# Altium PCB Arduino-RedBoard_rev1.0.PcbDoc
Units mm, origin at the board's own origin, x right, y up, seen from the top; angles counter-clockwise.
Board outline 68.6 x 53.3 mm, 2 copper layers (Top Layer, Bottom Layer); 50 components, 48 nets, 196 pads, 67 vias.
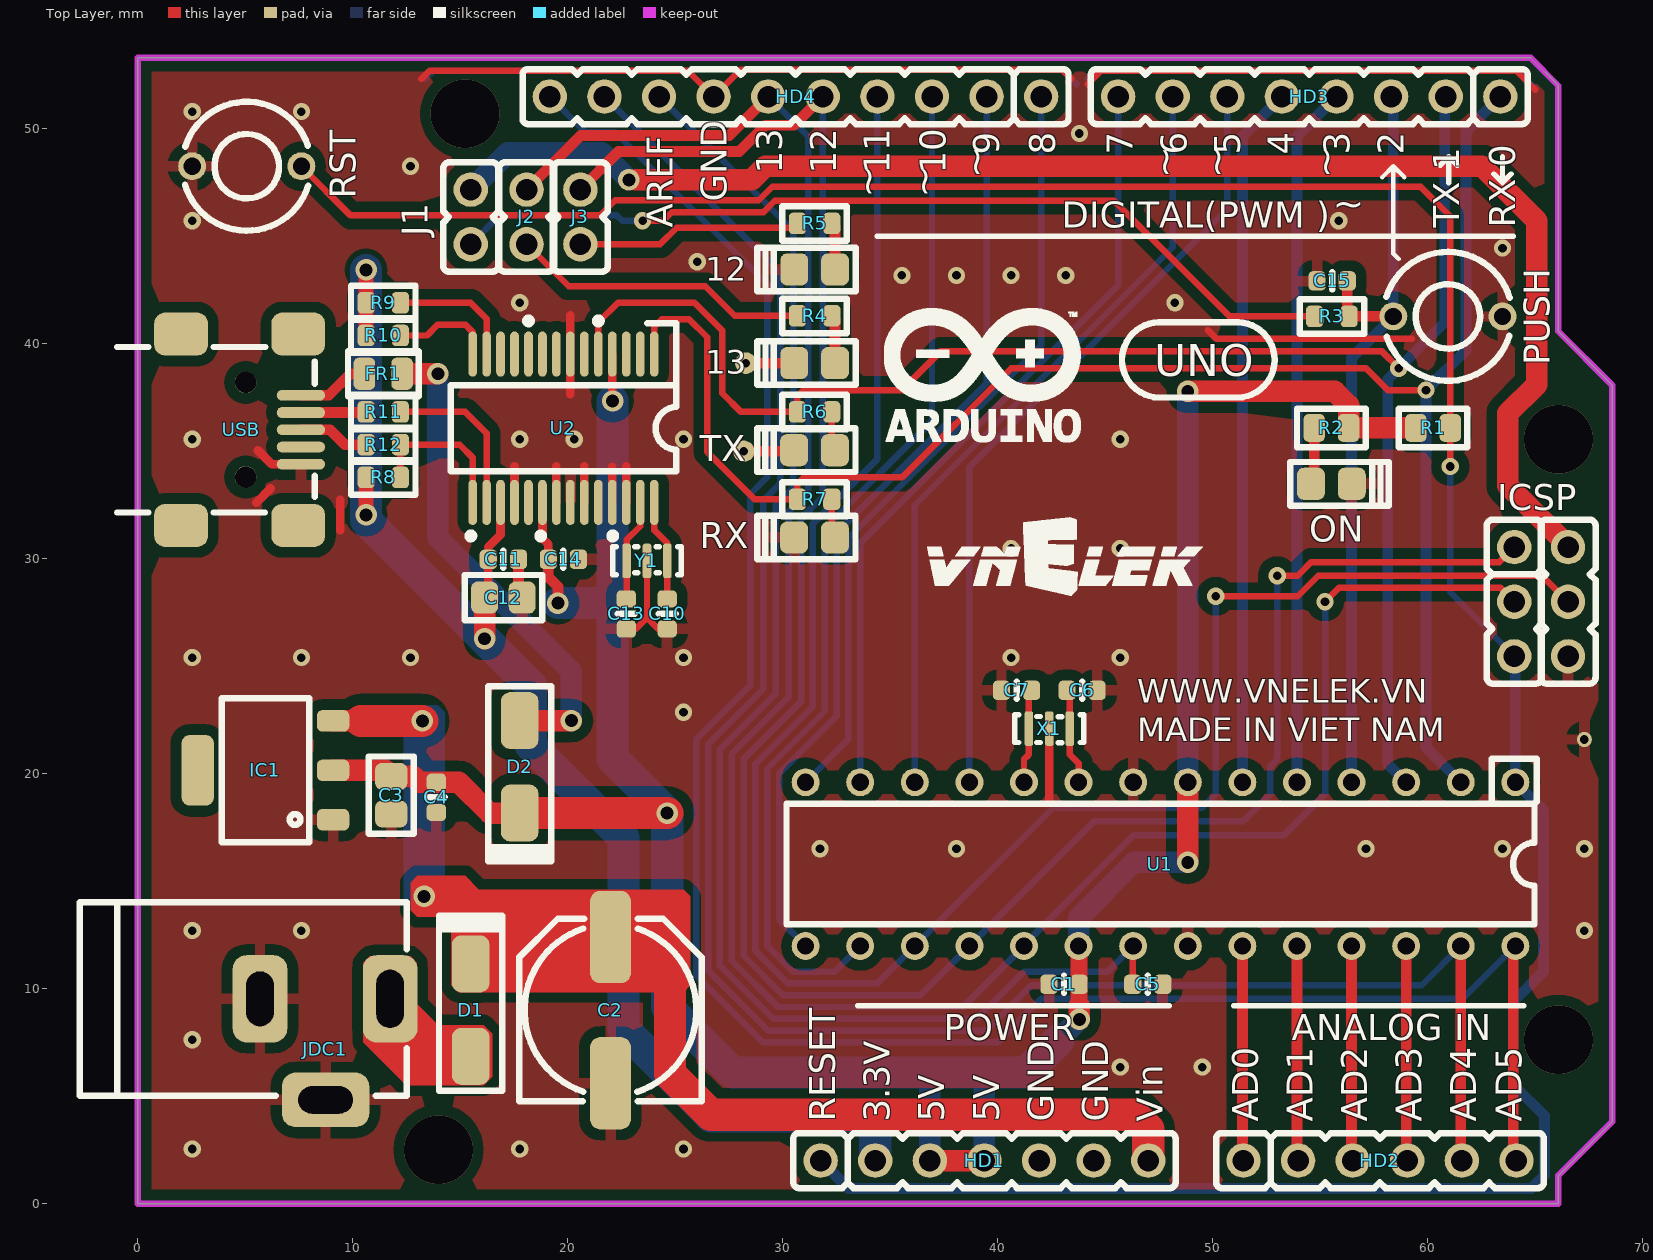
[diagram p0: Top Layer view]
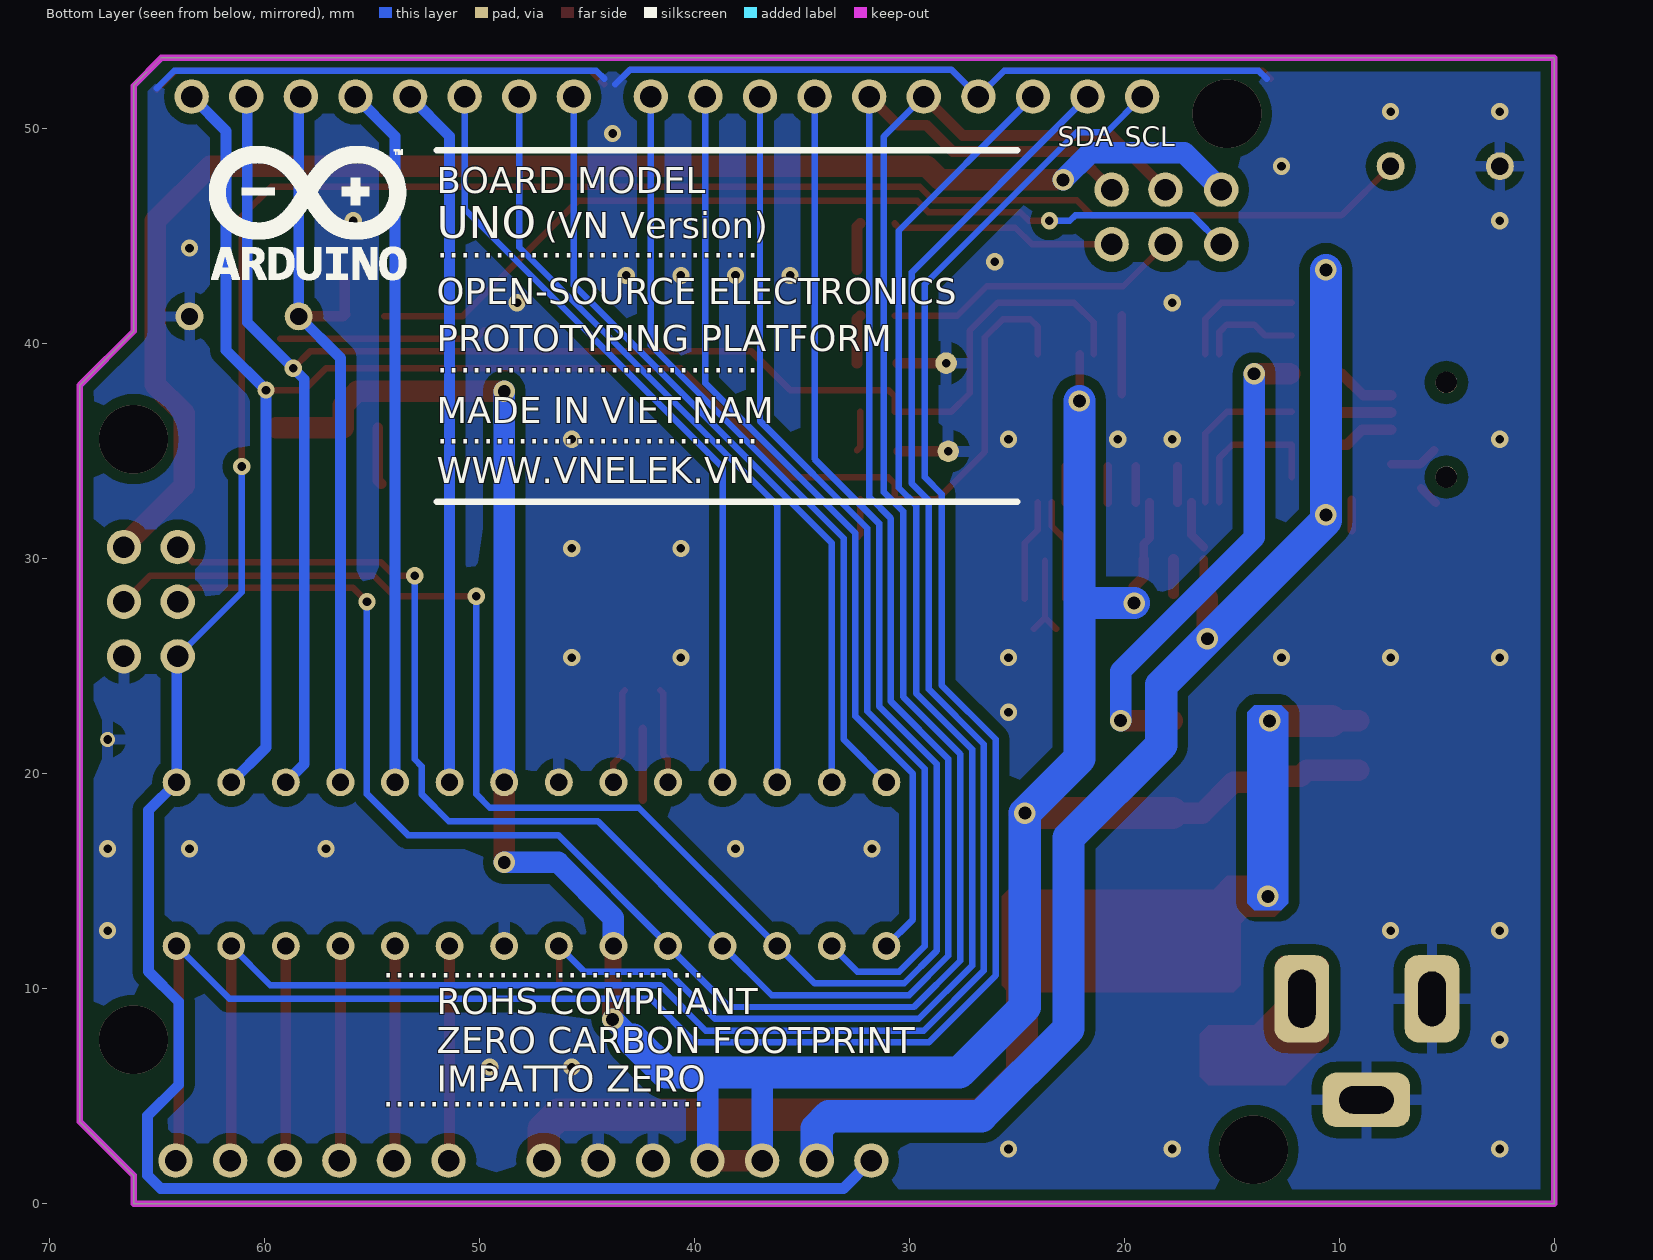
[diagram p1: Bottom Layer view, seen from below]
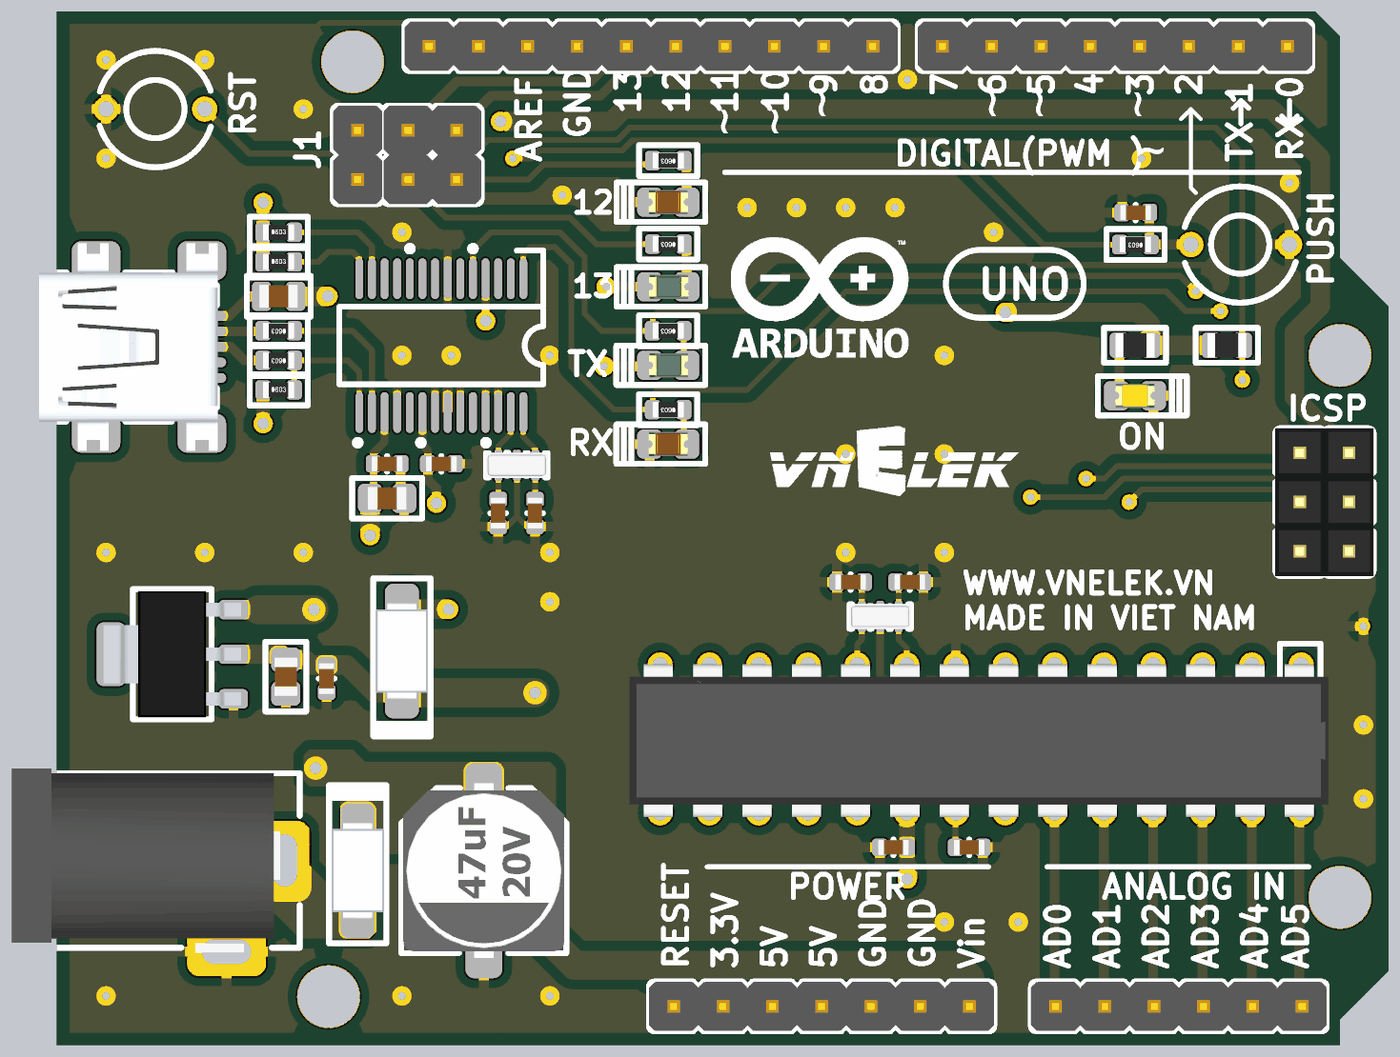
[diagram p2: 3D render of the assembled board from above, using the file's embedded part models]

## Layer stack, top to bottom
Top Layer: signal copper 0.0356
Dielectric: dielectric 0.32, FR-4, Dk 4.8
Bottom Layer: signal copper 0.0356

## Board outline
0,0 66.1,0 66.1,1.31 68.6,3.81 68.6,38.08 66.1,40.58 66.1,52.01 64.81,53.3 0,53.3 0,0

## Design rules (kind name [scope] priority, off if disabled: settings)
Clearance [All] p1: gap=0.25
PlaneClearance [All] p1: clearance=0.5
PlaneConnect [All] p1: planeconnectstyle=Relief reliefexpansion=0.508 reliefentries=4 reliefconductorwidth=0.5 reliefairgap=0.254
PolygonConnect PolygonConnect_1 [isvia] p1: connectstyle=Direct reliefconductorwidth=0.254 reliefentries=4 polygonreliefangle="90 Angle"
PolygonConnect [All] p2: connectstyle=Relief reliefconductorwidth=0.5 reliefentries=4 polygonreliefangle="90 Angle"
RoutingVias [All] p1: holewidth=0.8 width=1.2 viastyle="Through Hole" minholewidth=0.4 minwidth=0.8 maxholewidth=0.6 maxwidth=1
SilkscreenOverComponentPads [All] p1: minsilkscreentomaskgap=0.254
SolderMaskExpansion [All] p1: expansion=0.102
Width [All] p1: maxlimit=2 minlimit=0.3 preferedwidth=1
25 further rules are at their usual default settings.

## Classes and differential pairs
component class Arduino-RedBoard_new: 12 C1 C2 C3 C4 C5 C6 C7 C10 C11 C12 C13 C14 D1 D2 FR1 HD1 HD2 HD3 HD4 IC1 ICSP J1 J2 J3 JDC1 ON PUSH R1 R2 R3 R4 R5 R8 R9 R10 R11 R12 RST RX TX U1 U2 USB X1 Y1

## Components (designator, comment, footprint, x,y, rotation, side; value= is the part's Value field where it differs from the comment)
12 "Red" "Led 0805R" 31.5,43.46 r180 top (schematic designator LED3)
13 "Green" "Led 0805G" 31.5,39.1 r180 top (schematic designator LED2)
C1 "5AK102KABAA" C0603 43.1,10.2 r0 top
C2 "47uF/25V" C_FK_47UF_25V 22,9 r270 top
C3 "10uF/16V" C0805 11.8,19 r270 top
C4 "100nF" C0603 13.9,18.9 r90 top
C5 "5AK102KABAA" C0603 47,10.2 r180 top
C6 "5AK102KABAA" C0603 43.942,23.876 r180 top
C7 "5AK102KABAA" C0603 40.894,23.876 r0 top
C10 "CC0603JRNPO9BN" C0603 24.638,27.432 r90 top
C11 "CC0603JRNPO9BN" C0603 17.018,29.972 r180 top
C12 "C0805KRX7R7BB" C0805 17.018,28.194 r0 top
C13 "CC0603JRNPO9BN" C0603 22.738,27.432 r90 top
C14 "CC0603JRNPO9BN" C0603 19.812,29.972 r0 top
C15 "100nF" C0603 55.576,42.926 r0 top
D1 "SS14" SS14 15.5,9 r90 top
D2 "SS14" SS14 17.78,20.32 r270 top
FR1 "Ferrit Bead" CB2012 11.43,38.608 r0 top
HD1 "POWER" Header_7 39.4,2 r0 top
HD2 "AD" Header_6 57.8,2 r0 top
HD3 "IOL" Header_8 54.51,51.5 r180 top
HD4 "IOH" Header_10 30.61,51.5 r180 top
IC1 "AMS1117 (5V)" AMS1117-5.0V 5.95,20.155 r90 top
ICSP "ISP" Header_3x2 65.3,28 r270 top (schematic designator HD5)
J1 "Short Jump" Header_2 15.5,45.9 r90 top
J2 "Short Jump" Header_2 18.1,45.9 r90 top
J3 "Short Jump" Header_2 20.6,45.9 r90 top
JDC1 "Jack DC" DC-IN 11.747,9.525 r0 top
ON "Green" "Led 0805Y" 55.54,33.484 r0 top (schematic designator LED1)
PUSH "RESET" "BUTTON 2PIN TRON" 63.5,41.275 r180 top (schematic designator SW2)
R1 "Res2" RESC2012L 60.27,36.084 r180 top
R2 "Res2" RESC2012L 55.54,36.084 r0 top
R3 "Res2" "RM06JTN (0603)" 55.562,41.275 r180 top
R4 "Res2" "RM06JTN (0603)" 31.5,41.3 r180 top
R5 "Res2" "RM06JTN (0603)" 31.5,45.6 r180 top
R6 "Res2" "RM06JTN (0603)" 31.496,36.83 r180 top
R7 "Res2" "RM06JTN (0603)" 31.496,32.766 r180 top
R8 "RM06JTN" "RM06JTN (0603)" 11.43,33.782 r0 top
R9 "RM06JTN" "RM06JTN (0603)" 11.43,41.91 r0 top
R10 "RM06JTN" "RM06JTN (0603)" 11.43,40.386 r0 top
R11 "Res2" "RM06JTN (0603)" 11.43,36.83 r180 top
R12 "Res2" "RM06JTN (0603)" 11.43,35.306 r180 top
RST "RESET" "BUTTON 2PIN TRON" 2.54,48.26 r0 top (schematic designator SW1)
RX "Yellow" "Led 0805R" 31.496,30.988 r180 top (schematic designator LED5)
TX "Yellow" "Led 0805G" 31.496,35.052 r180 top (schematic designator LED4)
U1 "ATmega328 (DIP)" "ATmega328 (DIP)" 64.1,19.6 r180 top
U2 "PL2303_TA" PL2303HX 19.812,36.068 r270 top
USB "USB Mini" USBMNIB 7.6,36 r270 top (schematic designator USB1)
X1 "12Mhz" CSTCE16M0V53-R0 42.418,22.098 r180 top
Y1 "12MHz" CSTCE16M0V53-R0 23.7,29.9 r0 top

## Footprints (in the part's own frame and the unit in brackets; to place one, negate y for a bottom-side part, rotate by r counter-clockwise, add the part's x,y. Pads: shape width x height; smd on the part's side, far side on the other; paste and mask are expansions set on the pad)
AMS1117-5.0V [mm] "SOT223, 4-Leads, Body 6.7x7.3mm (max), Pitch 2.30mm, IPC Medium Density"
  rrect50% 1x1.5 smd: 1(-2.3,-3.15) 2(0,-3.15) 3(2.3,-3.15)
  rrect50% 3.28x1.5 smd: 4(0,3.15)
  silkscreen extent -3.35,-2.03 3.35,2.03, body extent -3.25,-3.54 3.25,3.54, height 1.65
"ATmega328 (DIP)" [mm] "DIP 28, W7.62, Picth 2.54"
  round 1.3 hole 0.8: 1(0,0) 2(2.54,0) 3(5.08,0) 4(7.62,0) 5(10.16,0) 6(12.7,0) 7(15.24,0) 8(17.78,0) 9(20.32,0) 10(22.86,0) 11(25.4,0) 12(27.94,0) 13(30.48,0) 14(33.02,0) 15(33.02,7.62) 16(30.48,7.62) 17(27.94,7.62) 18(25.4,7.62) 19(22.86,7.62) 20(20.32,7.62) 21(17.78,7.62) 22(15.24,7.62) 23(12.7,7.62) 24(10.16,7.62) 25(7.62,7.62) 26(5.08,7.62) 27(2.54,7.62) 28(0,7.62)
  silkscreen extent -1,-1.1 33.91,6.6, body extent -1.4,-0.03 34.6,7.84, height 5.08
"BUTTON 2PIN TRON" [mm] "PIN TO PIN 5.08, W=6MM"
  round 1.3 hole 0.8: 1(0,0) 2(5.08,0)
  silkscreen extent -0.33,-3 5.4,3
C0603 [mm] "Chip Capacitor, Body 1.6x0.8mm, 1608"
  rrect50% 0.8x0.9 smd: 1(-0.7,0) 2(0.7,0)
  silkscreen extent 0,-0.4 0,0.4, body extent -0.8,-0.4 0.8,0.4, height 0.6
C0805 [mm] "Chip Capacitor, 2-Leads, Body 2.0x1.3mm, IPC Medium Density"
  rrect50% 1.25x1.5 smd: 1(-0.875,0) 2(0.875,0)
  silkscreen extent -1.8,-1.05 1.8,1.05, body extent -1,-0.6 1,0.6, height 0.95
C_FK_47UF_25V [mm] "ALUMINUM CAPACITOR 8.5x8.5x6.5mm"
  rrect50% 4.3x1.9 smd mask+0.1: 1(-3.4,0) 2(3.4,0)
  silkscreen extent -4.25,-4.25 4.25,4.25, body extent -4.5,-4.15 4.5,4.15, height 6.9
CB2012 [mm] "Ferrite Beads 2-Leads, Body 2.3x1.45mm, Ferrit Bead"
  rrect50% 1x1.5 smd: 1(-0.875,0) 2(0.875,0)
  silkscreen extent -1.64,-1.05 1.65,1.05, body extent -1,-0.6 1,0.6, height 0.95
CSTCE16M0V53-R0 [mm] "Cryxtal 16MHz_SMD"
  rrect50% 0.4x1.6 smd: 1(0.95,0) 2(-0.95,0) 3(0,0)
  silkscreen extent -1.6,-0.65 1.6,0.66, body extent -1.6,-0.65 1.6,0.65, height 1.02
DC-IN [mm] "Jac DC input"
  rrect50% 2.54x4.064 hole 1.27 slot 2.7 at 90 deg: 1(0,0)
  rrect50% 2.54x4.064 hole 1.27 slot 2.54 at 90 deg: 2(-6.05,0)
  rrect50% 4.064x2.54 hole 1.27 slot 2.54 at 0 deg: 3(-3,-4.7)
  silkscreen extent -14.43,-4.5 0.77,4.5, body extent -14.06,-4.76 -0.23,4.75, height 11.02
Header_2 [mm] "Connector DIP, 2Pin_2.54mm"
  round 1.6 hole 1 mask+0.1: 1(-1.27,0) 2(1.27,0)
  silkscreen extent -2.54,-1.28 2.54,1.28, body extent -2.54,-1.27 2.54,1.27, height 10.1
Header_3x2 [mm] "Connector DIP, 2x3Pin_2.54mm"
  round 1.6 hole 1 mask+0.1: 1(-2.54,-1.25) 2(0,-1.25) 3(2.54,-1.25) 4(-2.54,1.25) 5(0,1.25) 6(2.54,1.25)
  silkscreen extent -3.81,-2.53 3.81,2.53, body extent -3.81,-2.54 3.81,2.54, height 8.45
Header_6 [mm] "Connector DIP Male, 6Pin_2.54mm"
  round 1.6 hole 1 mask+0.1: 1(-6.35,0) 2(-3.81,0) 3(-1.27,0) 4(1.27,0) 5(3.81,0) 6(6.35,0)
  silkscreen extent -7.62,-1.28 7.62,1.28, body extent -7.62,-1.27 7.62,1.27, height 10.1
Header_7 [mm] "Connector DIP Male, 7Pin_2.54mm"
  round 1.6 hole 1 mask+0.1: 1(-7.62,0) 2(-5.08,0) 3(-2.54,0) 4(0,0) 5(2.54,0) 6(5.08,0) 7(7.62,0)
  silkscreen extent -8.89,-1.28 8.89,1.28, body extent -8.89,-1.27 8.89,1.27, height 10.1
Header_8 [mm] "Connector DIP Male, 8Pin_2.54mm"
  round 1.6 hole 1 mask+0.1: 1(-8.89,0) 2(-6.35,0) 3(-3.81,0) 4(-1.27,0) 5(1.27,0) 6(3.81,0) 7(6.35,0) 8(8.89,0)
  silkscreen extent -10.16,-1.28 10.16,1.28, body extent -10.16,-1.27 10.16,1.27, height 10.1
Header_10 [mm] "Connector DIP Male, 10Pin_2.54mm"
  round 1.6 hole 1 mask+0.1: 1(-11.43,0) 2(-8.89,0) 3(-6.35,0) 4(-3.81,0) 5(-1.27,0) 6(1.27,0) 7(3.81,0) 8(6.35,0) 9(8.89,0) 10(11.43,0)
  silkscreen extent -12.7,-1.28 12.7,1.28, body extent -12.7,-1.27 12.7,1.27, height 10.1
"Led 0805G" [mm] "Chip LED; Green; Body 2.0 x 1.3 mm (LxW typ)"
  rrect50% 1.3x1.5 smd: 1(-0.95,0) 2(0.95,0)
  silkscreen extent -1.91,-1.02 2.67,1.02, body extent -1.04,-0.62 0.98,0.62, height 1.1
"Led 0805R" [mm] "Chip LED; RED ; Body 2.0 x 1.3 mm (LxW typ)"
  rrect50% 1.3x1.5 smd: 1(-0.95,0) 2(0.95,0)
  silkscreen extent -1.91,-1.02 2.67,1.02, body extent -1.01,-0.63 1.01,0.62, height 1.1
"Led 0805Y" [mm] "Chip LED; Yellow; Body 2.0 x 1.3 mm (LxW typ)"
  rrect50% 1.3x1.5 smd: 1(-0.95,0) 2(0.95,0)
  silkscreen extent -1.91,-1.02 2.67,1.02, body extent -1.01,-0.63 1.01,0.62, height 1.1
PL2303HX [mm] "SOP, 28-Leads, Body 10.5x5.6mm (max), Pitch 0.65mm, IPC Medium Density"
  oval 2.1x0.4 smd: 1(-3.45,4.225) 2(-3.45,3.575) 3(-3.45,2.925) 4(-3.45,2.275) 5(-3.45,1.625) 6(-3.45,0.975) 7(-3.45,0.325) 8(-3.45,-0.325) 9(-3.45,-0.975) 10(-3.45,-1.625) 11(-3.45,-2.275) 12(-3.45,-2.925) 13(-3.45,-3.575) 14(-3.45,-4.225) 15(3.45,-4.225) 16(3.45,-3.575) 17(3.45,-2.925) 18(3.45,-2.275) 19(3.45,-1.625) 20(3.45,-0.975) 21(3.45,-0.325) 22(3.45,0.325) 23(3.45,0.975) 24(3.45,1.625) 25(3.45,2.275) 26(3.45,2.925) 27(3.45,3.575) 28(3.45,4.225)
  silkscreen extent -5.15,-5.25 5.16,5.25
RESC2012L [mm] "Chip Resistor, Body 2.0x1.3mm, 1/8W 0805"
  rrect50% 1x1.3 smd: 1(-0.8,0) 2(0.8,0)
  silkscreen extent -1.6,-0.9 1.6,0.9, body extent -1,-0.62 1,0.63, height 0.6
"RM06JTN (0603)" [mm] "RESISTOR_1/10W_SMD"
  rrect50% 0.8x1 smd mask+0.1: 1(-0.8,0) 2(0.8,0)
  silkscreen extent -1.5,-0.8 1.5,0.8, body extent -0.8,-0.41 0.8,0.41, height 0.45
SS14 [mm] "Diode SMD"
  rrect50% 2.65x1.75 smd: 1(-2.15,0) 2(2.15,0)
  silkscreen extent -3.75,-1.48 4.4,1.48, body extent -2.5,-1.35 2.5,1.35, height 2.15
USBMNIB [mm] "9.2mmX7.75mm"
  oval 0.5x2.25 smd: 1(-1.6,0) 2(-0.8,0) 3(0,0) 4(0.8,0) 5(1.6,0)
  rrect50% 2x2.5 smd: 6(-4.45,-0.125) 7(4.45,-0.125) 8(-4.45,-5.575) 9(4.45,-5.575)
  round 1 hole 1 mask+0.1: HOLE1(-2.2,-2.57) HOLE2(2.2,-2.57)
  silkscreen extent -3.85,-8.55 3.85,0.64, body extent -5.35,-8.52 5.35,0.68, height 3.95

## Part data
12 13 ON RX TX: library part LED, "LED Single colour Green and Red"
C1 C5 C6 C7: "CAP NPO CAPNTO 1nF 100V 10%"
C2: library part CP1
C3: library part CP1, "Cap P  0,1uF < 22uF , 16 - 50V"
C4 C15: library part CN2, "Cap np 104 => 105pF"
C10 C13: library part Cap, "22pF/50V ±5% NPO SMD-0603 Capacitor"
C11 C14: library part Cap, "100nF/50V ±10% X7R SMD-0603 Capacitor"
C12: library part Cap, "10uF/16V ±10% X7R SMD-0805 Capacitor"
D1 D2: library part D1A, "Diode 1A"
FR1: library part Res2
HD1: library part Hed7, "Header 7"
HD2: library part Hed6, "Header 6"
HD3: library part Hed8, "Hedear 8"
HD4: library part Hed10, "Header 10"
IC1: library part AMS1117, "1A LOW DROPOUT VOLTAGE REGULATOR"
ICSP: library part HED3x2, "Header 3x2"
J1 J2 J3: library part ShortJump
JDC1: library part DCIN, "Jac DC input"
PUSH RST: library part SW2, "Switch button 2 pin"
R1 R2 R3 R4 R5 R6 R7 R11 R12: "Resistor"
R8: library part Res2, "1.5K ±5% SMD-0603 Resistor"
R9 R10: library part Res2, "10K ±5% SMD-0603 Resistor"
U1: library part ATmega328_1, "Atmel 8-bit Microcontroller"
U2: library part PL2303_HXA, "USB to UART,28pin,EEPROM extract"
USB: library part USB_M
X1: library part XT2, "Crystal For all Crystal 2pin."
Y1: library part XTAL, "12MHz-HC49S,crytal holes"

## Free pads (board coordinates)
  round 1 hole 0.4: 1(28.3,39.1) 2(28.2,35)
  round 0.7 hole 0.4: 32(67.31,21.59)

## Via types
v1: diameter 0.8, hole 0.4, Top Layer to Bottom Layer, 49 vias
v2: diameter 1, hole 0.6, Top Layer to Bottom Layer, 14 vias
v3: diameter 3.2, hole 3.2, Top Layer to Bottom Layer, 4 vias

## Nets (pads, with @x,y where several pads share a name; then routed paths per layer and width w, separated by ;. In a path a pad name is that pad's centre, name@x,y a point inside that pad or via, vN(x,y) a via of type N, cw(c..) or ccw(c..) an arc to the next point about the centre after c; other vN are vias at no path point)
3V3: C11.2 C12.1 HD1.2 R8.1 R9.1 R10.1 U2.17 | length 66.4
  Top Layer w0.4: C12.1 16.318,28.369 C11.2 ; 16.318,30.542 16.887,31.111 U2.17
  Top Layer w0.7: v2(10.63,32.042) R8.1 ; R10.1 R9.1 v2(10.63,43.434)
  Top Layer w1: v2(16.143,26.275) C12.1 C12.1@16.256,28.081
  Bottom Layer w1.5: v2(10.63,43.434) v2(10.63,32.042) 10.63,31.788 v2(16.143,26.275) 18.288,24.13 18.288,21.336 22.606,17.018 22.606,8.128 26.67,4.064 33.748,4.064 34.32,3.492 HD1.2
5V: C1.2 C3.1 C4.2 C14.1 D2.2 HD1.3 HD1.4 IC1.2 R1.2 R2.2 U1.7 U1.20 U2.4 U2.20 | length 132.7
  Top Layer w0.4: U2.20 18.837,30.947 19.112,30.672 C14.1 ; U2.4 22.087,37.349 v2(22.098,37.338)
  Top Layer w0.5: C14.1 19.112,29.148 19.558,28.702 v2(19.558,27.94)
  Top Layer w0.8: U1.20 43.8,11.96 C1.2 43.8,9.222 43.815,9.207
  Top Layer w1: IC1.2 11.52,20.155 C3.1 12.828,19.875 13.102,19.6 C4.2 14.944,19.6 16.374,18.17 D2.2 ; HD1.3 HD1.4 ; v2(43.815,8.572) 43.815,9.207 ; v2(48.86,15.875) U1.7 ; v2(48.86,37.782) 55.705,37.782 56.34,37.148 R2.2 R1.2
  Top Layer w1.5: D2.2 v2(24.638,18.17)
  Bottom Layer w1: HD1.3 36.86,6.096 36.86,6.32 ; HD1.4 39.4,6.096 39.4,6.32 ; 42.862,7.62 v2(43.815,8.572) ; U1.20 43.78,13.3 46.355,15.875 v2(48.86,15.875) ; U1.7 v2(48.86,37.782)
  Bottom Layer w1.5: v2(19.558,27.94) 22.098,27.94 ; v2(22.098,37.338) 22.098,27.94 ; 42.862,7.62 41.338,6.096 39.4,6.096 36.86,6.096 27.686,6.096 24.638,9.144 v2(24.638,18.17) 22.098,20.71 22.098,27.94
AD0: HD2.1 U1.23 | length 10
  Top Layer w0.5: U1.23 51.4,2.05 HD2.1
AD1: HD2.2 U1.24 | length 10
  Top Layer w0.5: U1.24 53.94,2.05 HD2.2
AD2: HD2.3 U1.25 | length 10
  Top Layer w0.5: U1.25 56.48,2.05 HD2.3
AD3: HD2.4 U1.26 | length 10
  Top Layer w0.5: U1.26 59.02,2.05 HD2.4
AD4/SDA: HD2.5 HD4.9 U1.27 | length 93.2
  Top Layer w0.5: U1.27 61.56,2.05 HD2.5
  Bottom Layer w0.3: HD4.9 29.9,43.32 29.9,33.5 29.1,32.7 29.1,23.924 26.545,21.369 26.545,10.841 29.341,8.045 39.478,8.045 41.593,10.16 59.74,10.16 U1.27
AD5/SCL: HD2.6 HD4.10 U1.28 | length 98.6
  Top Layer w0.5: U1.28 64,11.88 64,2.15 HD2.6
  Bottom Layer w0.3: HD4.10 20.833,49.847 22.225,49.847 29.3,42.773 29.3,33.8 28.5,33 28.5,24.102 25.995,21.597 25.995,10.613 29.113,7.495 40.005,7.495 42.035,9.525 61.645,9.525 U1.28
AREF: C5.2 HD4.8 U1.21 | length 67.9
  Top Layer w0.3: C5.2 46.3,11.96 U1.21
  Bottom Layer w0.3: HD4.8 30.5,45.26 30.5,33.3 29.7,32.5 29.7,23.747 27.095,21.142 27.095,11.069 29.569,8.595 39.052,8.595 41.252,10.795 45.135,10.795 U1.21
GND: 12.2 13.2 C1.1 C2.2 C3.2 C4.1 C5.1 C6.1 C7.1 C10.1 C11.1 C12.2 C13.1 C14.2 C15.1 HD1.5 HD1.6 HD4.7 IC1.1 ICSP.6 JDC1.2 JDC1.3 ON.2 pad.1 pad.2 pad.32 PUSH.1 RST.1 RX.2 TX.2 U1.8 U1.22 U2.7 U2.18 U2.21 U2.22 U2.23 U2.25 U2.26 USB.5 X1.3 Y1.3 | length 146
  Top Layer w0.3: 13.208,52.324 13.584,52.7 25.6,52.7 HD4.7 28.05,52.75 43.008,52.75 43.434,52.324 ; C13.1@23.176,26.732 23.7,27.256 ; Y1.3 23.7,27.256 ; C10.1@24.224,26.732 23.7,27.256 ; 44.196,52.07 44.826,52.7 64.14,52.7 65.024,51.816 ; 49.784,40.64 50.199,40.225 59.275,40.225
  Top Layer w0.4: 5.527,32.6 6.201,33.274 ; 5.588,35.052 6.24,34.4 USB.5 ; 9.425,31.329 9.425,32.739 ; U2.18 17.537,34.29 ; U2.21 19.487,34.29 ; 20.137,37.663 U2.7 20.137,41.331 ; U2.23 20.787,34.29 ; U2.25 22.087,34.279 ; U2.26 22.737,34.29 ; 42.418,18.796 X1.3
  Top Layer w0.5: C12.2@17.718,28.369 C11.1 ; pad.2 TX.2@30.494,35 ; pad.1 13.2
  Bottom Layer w0.3: 13.39,52.324 13.766,52.7 25.6,52.7 HD4.7 28.05,52.75 43.008,52.75 43.688,52.07 ; 44.196,52.324 44.572,52.7 64.212,52.7 65.024,51.888
  other v1: 2.54,2.54 17.78,2.54 25.4,2.54 45.72,6.35 49.53,6.35 2.54,7.62 2.54,12.7 7.62,12.7 67.31,12.7 31.75,16.51 38.1,16.51 57.15,16.51 63.5,16.51 67.31,16.51 25.4,22.86 2.54,25.4 7.62,25.4 12.7,25.4 25.4,25.4 40.64,25.4 45.72,25.4 40.64,30.48 45.72,30.48 2.54,35.56 17.78,35.56 20.32,35.56 25.4,35.56 45.72,35.56 17.78,41.91 48.26,41.91 35.56,43.18 38.1,43.18 40.64,43.18 43.18,43.18 26.035,43.815 63.5,44.45 2.54,45.72 55.88,45.72 12.7,48.26 43.815,49.784 2.54,50.8 7.62,50.8
IO2/PUSH: C15.2 HD3.3 PUSH.2 R3.1 U1.4 | length 36.4
  Top Layer w0.5: R3.1@56.263,41.375 56.276,41.361 C15.2 ; R3.1 PUSH.2
  Bottom Layer w0.5: U1.4 56.48,39.335 PUSH.2 58.42,51.4 HD3.3
IO3: HD3.4 U1.5 | length 32.7
  Bottom Layer w0.5: U1.5 53.94,49.66 HD3.4
IO4: HD3.5 U1.6 | length 32.7
  Bottom Layer w0.5: U1.6 51.4,49.66 HD3.5
IO5: HD3.6 U1.11 | length 36.9
  Bottom Layer w0.3: U1.11 38.7,34.255 50.7,46.255 HD3.6
IO6: HD3.7 U1.12 | length 36.9
  Bottom Layer w0.3: U1.12 36.16,32.493 48.16,44.493 HD3.7
IO7: HD3.8 U1.13 | length 36.9
  Bottom Layer w0.3: U1.13 33.62,30.731 45.62,42.731 HD3.8
IO8: HD4.1 U1.14 | length 36.4
  Bottom Layer w0.3: U1.14 33.07,21.59 33.07,30.958 42.04,39.928 HD4.1
IO9: HD4.2 U1.15 | length 44
  Bottom Layer w0.3: U1.15 29.845,13.215 29.845,20.002 32.52,22.678 32.52,31.186 39.5,38.166 HD4.2
MISO/LED1: HD4.5 ICSP.1 J3.2 U1.18 | length 105.6
  Top Layer w0.3: v1(53.023,29.21) 53.975,29.21 54.61,29.845 63.355,29.845 ICSP.1
  Top Layer w0.5: J3.2 22.372,48.942 27.987,48.942 29.21,50.165 30.545,50.165 HD4.5
  Bottom Layer w0.3: HD4.5 31.88,32.88 30.87,31.87 30.87,23.361 28.195,20.686 28.195,11.524 30.024,9.695 36.415,9.695 U1.18 44.5,17.78 51.435,17.78 52.705,19.05 52.705,20.35 53.023,20.667 v1(53.023,29.21)
MOSI: HD4.4 ICSP.5 U1.17 | length 94.3
  Top Layer w0.3: v1(50.165,28.258) 53.975,28.258 54.927,29.21 65.34,29.21 ICSP.5
  Bottom Layer w0.3: HD4.4 34.42,34.642 31.42,31.642 31.42,23.133 28.745,20.458 28.745,11.752 30.252,10.245 34.425,10.245 U1.17 42.595,18.415 49.53,18.415 50.165,19.05 v1(50.165,28.258)
NetC6_2: C6.2 U1.9 X1.2 | length 4.5
  Top Layer w0.3: C6.2 43.368,23.75 X1.2 43.368,20.894 43.78,20.482 U1.9
NetC7_2: C7.2 U1.10 X1.1 | length 4.4
  Top Layer w0.3: U1.10 41.24,20.666 41.468,20.894 X1.1 41.468,23.75 C7.2
NetC10_2: C10.2 U2.28 Y1.1 | length 4.7
  Top Layer w0.3: U2.28 24.037,31.335 24.65,30.722 Y1.1 24.65,28.144 C10.2
NetC13_2: C13.2 U2.27 Y1.2 | length 4.8
  Top Layer w0.3: C13.2 22.75,28.144 Y1.2 22.75,30.878 23.387,31.515 U2.27
NetD1_1: D1.1 JDC1.1
NetFR1_1: FR1.1 USB.1 | length 3.4
  Top Layer w0.5: USB.1 8.898,37.6 9.906,38.608 FR1.1
NetJ1_1: J1.1 R3.2 | length 42.2
  Top Layer w0.3: v1(23.495,45.72) 24.447,45.72 24.85,46.123 29.123,46.123 29.651,46.65 45.425,46.65 50.8,41.275 R3.2@54.445,41.275
  Bottom Layer w0.3: J1.1 16.84,45.97 22.293,45.97 22.543,45.72 v1(23.495,45.72)
NetJ2_1: J2.1 R4.2 | length 14
  Top Layer w0.3: J2.1 20.058,42.672 26.416,42.672 27.788,41.3 R4.2
NetJ3_1: J3.1 R5.2 | length 10.5
  Top Layer w0.3: J3.1 24.31,44.63 25.082,45.402 30.503,45.402 R5.2
NetLED1_1: ON.1 R2.1 | length 2.7
  Top Layer w0.5: ON.1 54.74,33.634 R2.1
NetLED2_1: 13.1 R4.1 | length 2.3
  Top Layer w0.5: R4.1 32.45,41.15 13.1
NetLED3_1: 12.1 R5.1 | length 2.2
  Top Layer w0.5: R5.1 32.45,45.45 12.1
NetLED4_1: R6.1 TX.1 | length 1.8
  Top Layer w0.3: R6.1 32.296,35.202 TX.1
NetLED5_1: R7.1 RX.1 | length 1.8
  Top Layer w0.3: R7.1 32.296,31.138 RX.1
NetR8_2: R8.2 R12.1 U2.15 | length 7.2
  Top Layer w0.3: R8.2 R12.1 14.986,35.306 15.587,34.705 U2.15
NetR9_2: R9.2 U2.13 | length 6
  Top Layer w0.3: R9.2 15.494,41.91 16.237,41.167 U2.13
NetR10_2: R10.2 U2.14 | length 4.7
  Top Layer w0.3: R10.2 13.462,40.386 13.97,40.894 15.24,40.894 15.587,40.547 U2.14
NetR11_1: R11.1 U2.16 | length 7.6
  Top Layer w0.3: R11.1 15.24,36.83 16.237,35.833 U2.16
NetR11_2: R11.2 USB.2 | length 3
  Top Layer w0.5: USB.2 10.6,36.8 R11.2
NetR12_2: R12.2 USB.3 | length 3.3
  Top Layer w0.5: USB.3 8.958,36 9.652,35.306 R12.2
RESET: HD1.1 ICSP.3 R1.1 RST.2 U1.1 | length 137.6
  Top Layer w0.3: RST.2 9.91,45.97 21.522,45.97 22.225,46.672 28.895,46.672 29.53,47.307 59.69,47.307 61.069,45.928 R1.1 v1(61.069,34.29)
  Top Layer w0.5: ICSP.3 ICSP.3@64.1,25.41
  Bottom Layer w0.3: v1(61.069,34.29) 61.069,28.44 ICSP.3
  Bottom Layer w0.5: HD1.1 33.08,0.7 64.835,0.7 65.45,1.315 65.45,4.082 64,5.533 64,9.39 65.405,10.795 65.405,18.295 U1.1 ICSP.3@64.1,25.41
RX-I: HD3.1 R7.2 U1.2 U2.1 | length 81.3
  Top Layer w0.3: U2.1 24.037,40.801 24.384,41.148 25.654,41.148 26.5,40.302 26.5,34.968 28.702,32.766 R7.2 30.696,33.49 30.988,33.782 35.56,33.782 40.64,38.862 57.15,38.862 58.166,37.846 v1(59.944,37.846)
  Bottom Layer w0.5: U1.2 59.944,21.216 v1(59.944,37.846) 61.8,39.702 61.8,49.9 HD3.1
SCK/LED0: HD4.6 ICSP.2 J2.2 U1.19 | length 106.4
  Top Layer w0.3: v1(55.245,28) 55.905,28.66 63.39,28.66 ICSP.2
  Top Layer w0.5: J2.2 20.622,49.692 27.532,49.692 HD4.6
  Bottom Layer w0.3: HD4.6 31.2,49.64 31.2,33.1 30.3,32.2 30.3,23.569 27.645,20.914 27.645,11.297 29.797,9.145 38.405,9.145 U1.19 41.24,12.033 46.352,17.145 53.34,17.145 55.245,19.05 v1(55.245,28)
SS: HD4.3 U1.16 | length 48
  Bottom Layer w0.3: U1.16 32.435,10.795 30.48,10.795 29.295,11.98 29.295,20.23 31.97,22.905 31.97,31.414 36.96,36.404 HD4.3
TX-O: HD3.2 R6.2 U1.3 U2.5 | length 78.2
  Top Layer w0.3: U2.5 21.437,40.995 22.352,41.91 25.908,41.91 27.2,40.618 27.2,37.7 28.07,36.83 R6.2 30.696,37.554 30.988,37.846 35.56,37.846 37.376,39.662 57.874,39.662 v1(58.674,38.862)
  Bottom Layer w0.5: U1.3 58.166,20.454 58.166,38.354 v1(58.674,38.862) 60.81,40.998 60.81,51.45 HD3.2
VBUS: D2.1 FR1.2 | length 22.8
  Top Layer w1: FR1.2 v2(13.97,38.608) ; D2.1 v2(20.184,22.47)
  Bottom Layer w1: v2(13.97,38.608) 13.97,30.988 20.184,24.774 v2(20.184,22.47)
VCC: ICSP.4 J1.2 | length 68.7
  Top Layer w1: v2@23.177,47.625 28.575,47.625 29.21,48.26 62.547,48.26 65.087,45.72 65.087,38.1 63.75,36.762 63.75,33.405 66.55,30.605 ICSP.4
  Bottom Layer w1: J1.2 17.225,48.895 21.59,48.895 v2(22.86,47.625)
VIN: C2.1 D1.2 HD1.7 IC1.3 | length 33.8
  Top Layer w1: IC1.3 10.39,22.455
  Top Layer w1.5: 10.39,22.455 v2(13.247,22.455) ; C2.1@21.907,11.112 C2.1@22.225,10.795 ; 24.765,10.477 24.765,6.032 26.67,4.127 46.355,4.127 47.02,3.463 HD1.7
  other v2: 13.335,14.287
pads on no net: IC1.4 U2.2 U2.3 U2.6 U2.8 U2.9 U2.10 U2.11 U2.12 U2.19 U2.24 USB.4 USB.6 USB.7 USB.8 USB.9 USB.HOLE1 USB.HOLE2
copper on no net:
  other v3: 14,2.5 66.1,7.62 66.1,35.56 15.24,50.7

## Polygon pours and split planes (outlines as drawn)
GND on Top Layer "Top Layer-No Net" (solid, remove dead copper, pour order 5): 0.5,0.5 0.5,52.5 0.5,52.75 64.5,52.75 65.5,51.75 65.5,40.5 68,38 68,37.75 68,4.25 68,4 65.5,1.5 65.5,0.5 0.5,0.5
GND on Bottom Layer "Top Layer-No Net" (solid, remove dead copper, pour order 7): 0.5,0.5 0.5,52.75 64.75,52.75 65.5,52 65.5,51.75 65.5,40.5 68,38 68,4 65.45,1.45 65.45,1.315 65.45,0.55 65.5,0.5 0.5,0.5

## Keep-outs
Keep-Out Layer:
  lines w0.3: 66.04,0 0,0 0,53.3 64.81,53.3 66.1,52.01 66.1,40.58 68.6,38.08 68.6,3.81 66.1,1.31 66.1,1.27 66.1,0

## Other copper
Top Layer:
  region net VIN: 14.605,10.16 14.922,9.842 25.4,9.842 25.717,10.16 25.717,14.287 25.4,14.605 15.875,14.605 15.24,15.24 13.018,15.24 12.7,14.922 12.7,13.652 13.018,13.335 14.287,13.335 14.605,13.018
  region net NetD1_1: 10.5,11.2 10.5,7.5 12.5,5.5 16.1,5.5 16.5,5.9 16.5,7.9 16.1,8.3 14,8.3 13.9,8.4 13,9.3 13,11.2 12.7,11.5 10.8,11.5
Bottom Layer:
  region net VIN: 12.383,22.86 12.7,23.177 13.97,23.177 14.287,22.86 14.287,13.97 13.97,13.652 12.7,13.652 12.383,13.97

## Silkscreen, mask and mechanical layers (free items; w line width, h text height)
Top Overlay:
  drawing of 5069 lines, arcs and shapes, not listed
  text "9" at 40.1,48.8 h1.2 r90
  text "8" at 42.7,48.8 h1.2 r90
  text "7" at 46.3,48.8 h1.2 r90
  text "6" at 48.8,48.8 h1.2 r90
  text "5" at 51.3,48.8 h1.2 r90
  text "4" at 53.8,48.8 h1.2 r90
  text "3" at 56.4,48.8 h1.2 r90
  text "2" at 58.9,48.8 h1.2 r90
  text "13" at 30,47.9 h1.2 r90
  text "12" at 32.5,47.9 h1.2 r90
  text "11" at 35,47.9 h1.2 r90
  text "10" at 37.6,47.9 h1.2 r90
  text "~" at 40.02,47.7 h2.2 r90
  text "~" at 48.8,47.7 h2.2 r90
  text "~" at 51.22,47.7 h2.2 r90
  text "~" at 56.3,47.7 h2.2 r90
  text "~" at 35,46.8 h2.2 r90
  text "~" at 37.6,46.8 h2.2 r90
  text "GND" at 27.4,46.6 h1.2 r90
  text "~" at 55.6,45.5 h2.2
  text "AREF" at 24.9,45.4 h1.2 r90
  text "DIGITAL(PWM )" at 43,45.4 h1.2
  text "TX 1" at 61.5,45.4 h1.2 r90
  text "RX 0" at 64.1,45.4 h1.2 r90
  text "UNO" at 47.3,38.5 h1.5
  text "WWW.VNELEK.VN" at 46.5,23.3 h1.1
  text "MADE IN VIET NAM" at 46.5,21.5 h1.1
  text "POWER" at 37.5,7.6 h1.2
  text "ANALOG IN" at 53.7,7.6 h1.2
  text "RESET" at 32.46,3.8 h1.2 r90
  text "3.3V" at 35,3.8 h1.2 r90
  text "5V" at 37.54,3.8 h1.2 r90
  text "5V" at 40.08,3.8 h1.2 r90
  text "GND" at 42.62,3.8 h1.2 r90
  text "GND" at 45.16,3.8 h1.2 r90
  text "Vin" at 47.7,3.8 h1.2 r90
  text "AD0" at 52.13,3.8 h1.2 r90
  text "AD1" at 54.67,3.8 h1.2 r90
  text "AD2" at 57.21,3.8 h1.2 r90
  text "AD3" at 59.75,3.8 h1.2 r90
  text "AD4" at 62.29,3.8 h1.2 r90
  text "AD5" at 64.4,3.8 h1.2 r90
Bottom Overlay:
  drawing of 2557 lines, arcs and shapes, not listed
  text "SCL" at 20,49.2 h0.9
  text "SDA" at 23.1,49.2 h0.9
  text "BOARD MODEL" at 52,47 h1.2
  text "(VN Version)" at 47,44.9 h1.2
  text "UNO" at 52,44.9 h1.5
  text "............................" at 52,44 h1.2
  text "OPEN-SOURCE ELECTRONICS" at 52,41.85 h1.2
  text "PROTOTYPING PLATFORM" at 52,39.65 h1.2
  text "............................" at 52,38.65 h1.2
  text "MADE IN VIET NAM" at 52,36.3 h1.2
  text "............................" at 52,35.35 h1.2
  text "WWW.VNELEK.VN" at 52,33.5 h1.2
  text "............................" at 54.5,10.5 h1.2
  text "ROHS COMPLIANT" at 52,8.8 h1.2
  text "ZERO CARBON FOOTPRINT" at 52,7 h1.2
  text "IMPATTO ZERO" at 52,5.2 h1.2
  text "............................" at 54.5,4.5 h1.2

## Text inside footprints (layer, text, board x,y; h text height)
C2: Mechanical 1 "+" at 20.5,12.84 h3 r270
HD1: Mechanical 1 "7" at 46.85,1.6 h1.2; Mechanical 1 "1" at 31.6,1.6 h1.2
HD2: Mechanical 1 "6" at 63.9,1.6 h1.2; Mechanical 1 "1" at 51.2,1.6 h1.2
HD3: Mechanical 1 "1" at 63.61,51.9 h1.2 r180; Mechanical 1 "8" at 45.91,51.9 h1.2 r180
HD4: Mechanical 1 "1" at 42.21,51.9 h1.2 r180; Mechanical 1 "10" at 19.71,51.9 h1.2 r180
IC1: Mechanical 1 "1" at 7.525,17.635 h1.2 r90; Mechanical 1 "2" at 7.525,19.84 h1.2 r90; Mechanical 1 "3" at 7.525,22.045 h1.2 r90
ICSP: Mechanical 1 "3" at 63.796,25.714 h1.2 r270; Mechanical 1 "1" at 63.796,30.794 h1.2 r270; Mechanical 1 "1" at 66.296,30.794 h1.2 r270; Mechanical 1 "3" at 66.296,25.714 h1.2 r270
J1: Mechanical 1 "1" at 15.754,44.376 h1.2 r90; Mechanical 1 "2" at 15.754,46.916 h1.2 r90
J2: Mechanical 1 "1" at 18.354,44.376 h1.2 r90; Mechanical 1 "2" at 18.354,46.916 h1.2 r90
J3: Mechanical 1 "1" at 20.854,44.376 h1.2 r90; Mechanical 1 "2" at 20.854,46.916 h1.2 r90
U1: Mechanical 1 "28" at 64.59,14.09 h1.2 r180; Mechanical 1 "15" at 32.19,13.99 h1.2 r180; Mechanical 1 "14" at 31.99,18.79 h1.2 r180; Mechanical 1 "1" at 64.19,18.79 h1.2 r180
U2: Mechanical 1 "28" at 23.622,34.544 h1.2 r270; Mechanical 1 "15" at 15.24,34.544 h1.2 r270; Mechanical 1 "14" at 15.24,38.608 h1.2 r270
USB: Mechanical 1 "1" at 5.06,37.778 h1.2 r270; Mechanical 1 "5" at 5.06,34.73 h1.2 r270